# Altium PCB RevB.PcbDoc (part 2 of 2)
Units mm, origin at the board's own origin, x right, y up, seen from the top; angles counter-clockwise.
Board outline 132.46 x 77.34 mm, 2 copper layers (Top Layer, Bottom Layer); 132 components, 78 nets, 535 pads, 141 vias.
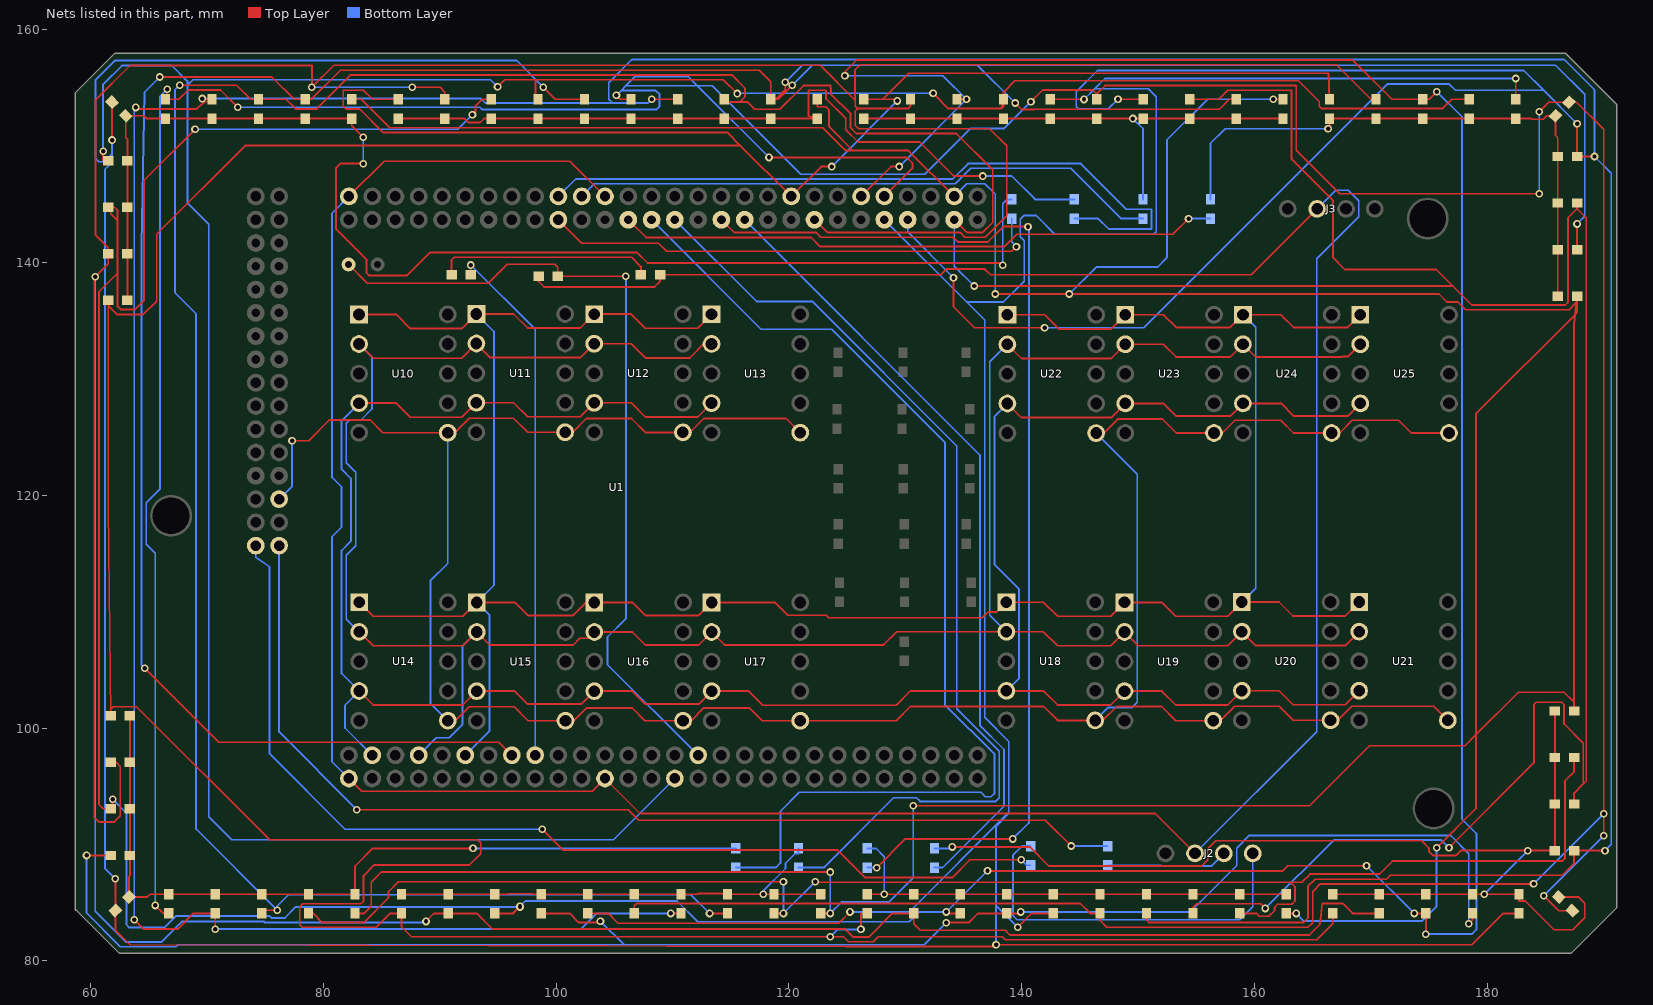
[diagram p2: the nets of this part, all layers, seen from the top]

## Via types
v1: diameter 0.66, hole 0.381, Top Layer to Bottom Layer, 141 vias

## Nets (pads, with @x,y where several pads share a name; then routed paths per layer and width w, separated by ;. In a path a pad name is that pad's centre, name@x,y a point inside that pad or via, vN(x,y) a via of type N, cw(c..) or ccw(c..) an arc to the next point about the centre after c; other vN are vias at no path point) (continued)
C_DP/IO_VB7N2_194: U1.194 U10.6 U11.6 U12.6 U13.6 U14.6 U15.6 U16.6 U17.6 U18.6 U19.6 U20.6 U21.6 U22.6 U23.6 U24.6 U25.6 | length 234
  Top Layer w0.152: v1(77.318,124.689) 78.74,124.689 80.518,126.467 84.023,126.467 85.117,125.373 U10.6@90.693,125.373 91.288,125.373 92.534,126.619 96.342,126.619 97.548,125.413 U11.6@100.773,125.413 101.422,125.413 102.603,126.594 106.477,126.594 107.672,125.398 U12.6@110.893,125.398 111.504,125.398 112.7,126.594 119.758,126.594 U13.6@120.973,125.378 ; U14.6@90.701,100.642 91.345,100.642 92.532,101.829 96.39,101.829 97.587,100.631 U15.6@100.805,100.631 101.52,100.631 102.616,101.727 106.524,101.727 107.62,100.631 U16.6@110.907,100.631 111.604,100.631 112.7,101.727 116.608,101.727 117.704,100.631 U17.6@120.978,100.631 129.21,100.631 130.432,101.854 141.884,101.854 143.084,100.655 U18.6@146.304,100.655 146.959,100.655 148.158,101.854 152.02,101.854 153.238,100.635 U19.6@156.452,100.635 157.049,100.635 158.293,101.879 162.109,101.879 163.322,100.666 U20.6@166.531,100.666 167.138,100.666 168.351,101.879 175.396,101.879 U21.6@176.609,100.666 ; U22.6@146.388,125.342 147.033,125.342 148.234,126.543 152.095,126.543 153.289,125.349 U23.6@156.519,125.349 157.226,125.349 158.318,126.441 162.255,126.441 163.347,125.349 U24.6@166.624,125.349 167.31,125.349 168.402,126.441 172.364,126.441 173.457,125.349 U25.6@176.708,125.349
  Bottom Layer w0.152: U1.194@76.201,119.669 77.318,120.786 v1(77.318,124.689) ; U10.6@90.693,125.373 90.693,114.133 89.203,112.642 89.203,102.14 U14.6@90.701,100.642 ; U18.6@146.304,100.655 147.422,101.772 149.487,101.772 149.924,102.21 149.924,121.806 U22.6@146.388,125.342
C_e/IO_VB7N0_183: U1.183 U10.4 U11.4 U12.4 U13.4 U14.4 U15.4 U16.4 U17.4 U18.4 U19.4 U20.4 U21.4 U22.4 U23.4 U24.4 U25.4 | length 219.3
  Top Layer w0.152: U10.4@83.073,127.913 86.26,127.913 87.478,126.695 91.896,126.695 U11.4@93.153,127.953 96.342,127.953 97.549,126.746 102.081,126.746 U12.4@103.273,127.938 106.451,127.938 107.669,126.721 112.156,126.721 U13.4@113.353,127.918 ; U14.4@83.081,103.182 84.282,101.981 91.995,101.981 U15.4@93.185,103.171 96.447,103.171 97.561,102.057 102.173,102.057 U16.4@103.287,103.171 106.528,103.171 107.642,102.057 112.244,102.057 U17.4@113.358,103.171 116.535,103.171 117.751,101.956 129.21,101.956 130.449,103.195 U18.4@138.684,103.195 141.864,103.195 143.078,101.981 147.637,101.981 U19.4@148.832,103.175 152.044,103.175 153.238,101.981 157.685,101.981 U20.4@158.911,103.206 162.103,103.206 163.303,102.006 167.79,102.006 U21.4@168.989,103.206 ; U22.4@138.768,127.882 139.98,126.67 147.68,126.67 U23.4@148.899,127.889 152.171,127.889 153.264,126.797 157.912,126.797 U24.4@159.004,127.889 162.281,127.889 163.373,126.797 167.996,126.797 U25.4@169.088,127.889
  Bottom Layer w0.152: U10.4@83.073,127.913 81.575,126.414 81.575,122.238 82.376,121.437 82.376,116.053 81.575,115.252 81.575,104.688 U14.4@83.081,103.182 81.864,101.965 81.864,100.006 U1.183@84.201,97.669 ; U18.4@138.684,103.195 139.777,104.287 139.777,111.912 137.668,114.021 137.668,126.782 U22.4@138.768,127.882
C_f/IO_VB7N0_176: U1.176 U10.2 U11.2 U12.2 U13.2 U14.2 U15.2 U16.2 U17.2 U18.2 U19.2 U20.2 U21.2 U22.2 U23.2 U24.2 U25.2 | length 226.1
  Top Layer w0.152: U10.2@83.073,132.993 84.291,131.775 91.896,131.775 U11.2@93.153,133.033 94.36,131.826 102.081,131.826 U12.2@103.273,133.018 106.453,133.018 107.671,131.801 111.502,131.801 112.7,132.998 U13.2@113.353,132.998 ; U14.2@83.081,108.262 84.282,107.061 91.995,107.061 U15.2@93.185,108.251 94.299,107.137 101.476,107.137 102.047,107.707 102.743,107.707 U16.2@103.287,108.251 106.556,108.251 107.671,107.137 112.244,107.137 U17.2@113.358,108.251 114.472,107.137 128.119,107.137 129.257,108.275 U18.2@138.684,108.275 141.864,108.275 143.078,107.061 147.637,107.061 U19.2@148.832,108.255 150.026,107.061 157.685,107.061 U20.2@158.911,108.286 160.111,107.086 167.79,107.086 U21.2@168.989,108.286 ; U22.2@138.768,132.962 139.98,131.75 147.68,131.75 U23.2@148.899,132.969 152.171,132.969 153.264,131.877 157.912,131.877 U24.2@159.004,132.969 160.096,131.877 167.538,131.877 167.589,131.928 168.046,131.928 U25.2@169.088,132.969
  Bottom Layer w0.152: U10.2@83.073,132.993 84.176,131.891 84.176,127.406 83.236,126.467 82.261,126.467 81.981,126.187 81.981,122.789 82.782,121.988 82.782,115.646 81.981,114.845 81.981,109.362 U14.2@83.081,108.262 ; U1.176@88.201,97.669 89.694,99.162 90.83,99.162 91.948,100.279 91.948,107.014 U15.2@93.185,108.251 ; U18.2@138.684,108.275 137.262,109.698 137.262,131.455 U22.2@138.768,132.962
C_g/IO_VB6N1_171: U1.171 U10.1 U11.1 U12.1 U13.1 U14.1 U15.1 U16.1 U17.1 U18.1 U19.1 U20.1 U21.1 U22.1 U23.1 U24.1 U25.1 | length 225.4
  Top Layer w0.152: U10.1@83.073,135.533 86.258,135.533 87.476,134.315 91.896,134.315 U11.1@93.153,135.573 96.342,135.573 97.549,134.366 102.081,134.366 U12.1@103.273,135.558 106.453,135.558 107.671,134.341 112.156,134.341 U13.1@113.353,135.538 ; U14.1@83.081,110.802 84.282,109.601 91.995,109.601 U15.1@93.185,110.791 96.447,110.791 97.561,109.677 101.476,109.677 102.591,110.791 U16.1@103.287,110.791 106.556,110.791 107.671,109.677 112.244,109.677 U17.1@113.358,110.791 118.796,110.791 119.888,109.699 123.203,109.699 123.43,109.472 136.624,109.472 137.123,109.971 137.84,109.971 U18.1@138.684,110.815 141.864,110.815 143.078,109.601 147.637,109.601 U19.1@148.832,110.795 152.044,110.795 153.238,109.601 157.685,109.601 U20.1@158.911,110.826 162.103,110.826 163.303,109.626 167.79,109.626 U21.1@168.989,110.826 ; U22.1@138.768,135.502 141.968,135.502 143.18,134.29 147.68,134.29 U23.1@148.899,135.509 152.171,135.509 153.264,134.417 157.912,134.417 U24.1@159.004,135.509 162.255,135.509 163.347,134.417 167.996,134.417 U25.1@169.088,135.509
  Bottom Layer w0.152: U1.171@92.201,97.669 94.285,99.753 94.285,109.692 U15.1@93.185,110.791 94.666,112.272 94.666,134.06 U11.1@93.153,135.573 ; U20.1@158.911,110.826 160.096,112.012 160.096,134.417 U24.1@159.004,135.509
D0: D10.1 D11.1 D12.1 D13.1 D14.1 D15.1 D16.1 D17.1 D18.1 D19.1 R30.2 | length 114.5
  Top Layer w0.152: D10.1@63.179,136.743 D11.1@63.179,140.743 D12.1@63.179,144.743 D13.1@63.179,148.743 63.179,150.571 63.022,150.728 D14.1@63.022,152.603 64.592,152.603 64.836,152.358 D15.1@66.439,152.358 D16.1@70.439,152.358 D17.1@74.439,152.358 D18.1@78.439,152.358 D19.1@82.439,152.358 82.439,151.749 v1(83.439,150.749) ; v1(83.439,148.488) 81.458,148.488 81.102,148.133 81.102,142.85 83.718,140.233 83.718,139.09 83.922,138.887 87.198,138.887 89.154,140.843 106.96,140.843 107.848,139.954 138.176,139.954 v1(138.379,139.751)
  Bottom Layer w0.152: v1(83.439,148.488) v1(83.439,150.749) ; v1(138.379,139.751) 138.379,145.034 138.76,145.415 R30.2@139.141,145.415
D0/IO_VB2N0_37: R30.1 U1.37 | length 43.2
  Top Layer w0.152: U1.37@100.201,143.669 102.214,141.656 108.799,141.656 109.503,140.951 139.141,140.951 v1(139.548,141.358)
  Bottom Layer w0.152: R30.1@139.141,143.764 139.141,141.764 v1(139.548,141.358)
D1: D20.1 D21.1 D22.1 D23.1 D24.1 D25.1 D26.1 D27.1 D28.1 D29.1 R31.2 | length 67
  Top Layer w0.152: D20.1@86.439,152.358 D21.1@90.439,152.358 92.142,152.358 92.488,152.013 93.462,152.013 93.808,152.358 D22.1@94.439,152.358 D23.1@98.439,152.358 D24.1@102.439,152.358 D25.1@106.439,152.358 D26.1@110.439,152.358 D27.1@114.439,152.358 D28.1@118.439,152.358 D29.1@122.439,152.358 121.691,152.587 121.691,154.79 123.19,154.79 123.19,154.076 124.892,152.375 124.892,151.384 125.933,150.343 131.242,150.343 134.163,147.422 v1(136.652,147.422)
  Bottom Layer w0.152: v1(136.652,147.422) 139.141,147.422 141.148,145.415 R31.2@144.526,145.415
D1/IO_VB2N0_38: R31.1 U1.38 | length 62.4
  Bottom Layer w0.152: U1.38@100.201,145.669 101.7,147.168 134.071,147.168 135.392,148.488 145.085,148.488 148.996,144.577 151.155,144.577 151.155,142.875 147.472,142.875 146.583,143.764 R31.1@144.526,143.764
D1_OUT: D1.2 R50.1 | length 18.6
  Top Layer w0.152: D1.2@91.02,138.949 91.02,140.208 91.249,140.436 106.489,140.436 107.283,139.643 R50.1@107.283,138.949
D2: D30.1 D31.1 D32.1 D33.1 D34.1 D35.1 D36.1 D37.1 D38.1 D39.1 R32.2 | length 43.3
  Top Layer w0.152: D30.1@126.439,152.358 D31.1@130.439,152.358 D32.1@134.439,152.358 D33.1@138.439,152.358 D34.1@142.439,152.358 D35.1@146.439,152.358 v1(149.555,152.358) D36.1@150.439,152.358 D37.1@154.439,152.358 D38.1@158.439,152.358 D39.1@162.439,152.358
  Bottom Layer w0.152: v1(149.555,152.358) 150.419,151.495 R32.2@150.419,145.415
D2/IO_VB2N0_41: R32.1 U1.41 | length 51
  Bottom Layer w0.152: U1.41@102.201,145.669 103.293,146.761 134.296,146.761 135.617,148.082 144.221,148.082 148.539,143.764 R32.1@150.419,143.764
D3: D40.1 D41.1 D42.1 D43.1 D44.1 D45.1 D46.1 D47.1 D48.1 D49.1 R33.2 | length 51.5
  Top Layer w0.152: v1(166.319,151.486) 166.439,151.606 D40.1@166.439,152.358 D41.1@170.439,152.358 D42.1@174.439,152.358 D43.1@178.439,152.358 D44.1@182.439,152.358 183.795,152.358 183.861,152.292 184.809,152.292 185.115,152.598 D45.1@185.855,152.598 185.855,150.924 186.055,150.724 D46.1@186.055,149.098 D47.1@186.055,145.098 D48.1@186.055,141.098 D49.1@186.055,137.098
  Bottom Layer w0.152: R33.2@156.21,145.415 156.21,150.216 157.48,151.486 v1(166.319,151.486)
D3/IO_VB2N0_43: R33.1 U1.43 | length 52
  Top Layer w0.152: U1.43@106.201,143.669 107.732,142.138 121.922,142.138 122.702,141.358 138.512,141.358 139.571,142.416 152.983,142.416 v1(154.33,143.764)
  Bottom Layer w0.152: v1(154.33,143.764) R33.1@156.21,143.764
D5: D60.1 D61.1 D62.1 D63.1 D64.1 D65.1 D66.1 D67.1 D68.1 D69.1 R40.2 | length 70.9
  Top Layer w0.152: D60.1@63.389,101.059 D61.1@63.389,97.059 D62.1@63.389,93.059 D63.1@63.389,89.059 63.389,87.306 63.307,87.224 D64.1@63.307,85.487 64.872,85.487 65.111,85.726 D65.1@66.722,85.726 D66.1@70.722,85.726 D67.1@74.722,85.726 D68.1@78.722,85.726 D69.1@82.722,85.726 82.722,88.138 84.246,89.662 v1(92.862,89.662)
  Bottom Layer w0.152: v1(92.862,89.662) R40.2@115.443,89.662
D5/IO_VB2N1_45: R40.1 U1.45 | length 92.8
  Bottom Layer w0.152: U1.45@108.201,143.669 117.606,134.264 123.672,134.264 133.401,124.536 133.401,102.014 137.668,97.747 137.668,94.412 137.363,94.107 136.881,94.107 136.5,94.488 120.904,94.488 119.274,92.858 119.274,88.413 118.872,88.011 R40.1@115.443,88.011
D6: D70.1 D71.1 D72.1 D73.1 D74.1 D75.1 D76.1 D77.1 D78.1 D79.1 R41.2 | length 41.4
  Top Layer w0.152: D70.1@86.722,85.726 D71.1@90.722,85.726 D72.1@94.722,85.726 95.84,85.726 95.876,85.762 97.973,85.762 98.009,85.726 D73.1@98.722,85.726 D74.1@102.722,85.726 D75.1@106.722,85.726 D76.1@110.722,85.726 112.127,85.726 112.186,85.786 114.26,85.786 114.32,85.726 D77.1@114.722,85.726 v1(117.805,85.726) D78.1@118.722,85.726 D79.1@122.722,85.726
  Bottom Layer w0.152: v1(117.805,85.726) 117.805,86.03 119.71,87.935 119.71,88.392 120.523,89.205 120.828,89.205 R41.2@120.828,89.662
D6/IO_VB2N2_49: R41.1 U1.49 | length 84
  Bottom Layer w0.152: U1.49@110.201,143.669 117.218,136.652 121.996,136.652 134.417,124.231 134.417,101.648 138.074,97.991 138.074,94.005 137.77,93.701 131.267,93.701 130.962,94.005 128.981,94.005 122.987,88.011 R41.1@120.828,88.011
D7: D80.1 D81.1 D82.1 D83.1 D84.1 D85.1 D86.1 D87.1 D88.1 D89.1 R42.2 | length 41
  Top Layer w0.152: D80.1@126.722,85.726 v1(128.194,85.726) D81.1@130.722,85.726 D82.1@134.722,85.726 D83.1@138.722,85.726 D84.1@142.722,85.726 D85.1@146.722,85.726 D86.1@150.722,85.726 D87.1@154.722,85.726 D88.1@158.722,85.726 D89.1@162.722,85.726
  Bottom Layer w0.152: R42.2@126.721,89.662 127.483,89.662 128.194,88.951 v1(128.194,85.726)
D7/IO_VB2N3_55: R42.1 U1.55 | length 94.4
  Top Layer w0.152: U1.55@114.201,143.669 115.3,142.57 122.341,142.57 122.741,142.17 134.112,142.17 134.518,141.764 137.105,141.764 138.419,143.078 v1(140.538,143.078) ; v1(127.533,88.011) 129.997,90.475 v1(139.243,90.475)
  Bottom Layer w0.152: R42.1@126.721,88.011 v1(127.533,88.011) ; v1(139.243,90.475) 140.614,91.846 140.614,143.002 v1(140.538,143.078)
D8: D90.1 D91.1 D92.1 D93.1 D94.1 D95.1 D96.1 D97.1 D98.1 D99.1 R43.2 | length 101.1
  Top Layer w0.152: v1(134.036,89.789) 140.691,89.789 142.342,88.138 155.448,88.138 155.981,88.671 155.981,89.637 156.667,90.322 174.351,90.322 174.978,89.695 174.978,89.408 175.343,89.043 177.293,89.043 177.722,89.472 v1(183.476,89.472) D96.1@185.801,89.472 D97.1@185.801,93.472 D98.1@185.801,97.472 D99.1@185.801,101.472 ; D90.1@166.722,85.726 D91.1@170.722,85.726 D92.1@174.722,85.726 D93.1@178.722,85.726 v1(179.73,85.726) D94.1@182.722,85.726 182.722,85.141 183.261,85.141 185.725,82.677 187.353,82.677 188.366,83.69 188.366,84.966 187.85,85.482 D95.1@186.139,85.482
  Bottom Layer w0.152: R43.2@132.512,89.662 133.909,89.662 v1(134.036,89.789) ; v1(179.73,85.726) v1(183.476,89.472)
D8/IO_VB2N3_57: R43.1 U1.57 | length 67.8
  Bottom Layer w0.152: U1.57@116.201,143.669 136.411,123.459 136.411,100.229 138.481,98.159 138.481,93.294 133.198,88.011 R43.1@132.512,88.011
G0/IO_VB3N2_69: D10.2 D20.2 D30.2 D40.2 D60.2 D70.2 D80.2 D90.2 U1.69 | length 360.8
  Top Layer w0.152: D10.2@61.528,136.743 61.528,136.262 ; D20.2@86.439,154.009 84.226,154.009 83.446,154.79 81.709,154.79 81.709,153.416 81.938,153.187 83.109,153.187 85.125,151.172 114.698,151.172 115.832,150.038 ; v1(123.673,148.234) 122.766,148.234 U1.69@120.201,145.669 115.832,150.038 ; v1(126.187,82.702) 126.187,84.075 D80.2@126.722,84.075 ; D30.2@126.439,154.009 128.05,154.009 ; v1(129.311,153.873) 129.175,154.009 128.05,154.009 ; D40.2@166.439,154.009 166.363,156.261 130.302,156.261 128.05,154.009 ; D90.2@166.722,84.075 166.722,83.181 165.354,81.814 138.583,81.814 138.329,82.067 127.687,82.067 127.256,81.636 125.121,81.636 124.689,82.067 v1(123.546,82.067) 87.579,82.067 86.722,82.925 D70.2@86.722,84.075 85.751,84.075 84.557,82.88 78.207,82.88 77.978,83.109 77.978,84.658 78.232,84.912 83.236,84.912 83.464,85.141 83.464,87.325 84.379,88.24 92.558,88.24 93.523,89.205 93.523,90.145 93.269,90.399 75.387,90.399 63.957,101.829 61.967,101.829 61.738,101.6 D60.2@61.738,101.059 61.528,118.98 61.528,136.262 ; 61.528,136.262 62.255,135.534 64.541,135.534 65.684,136.677 65.684,142.443 73.279,150.038 115.832,150.038
  Bottom Layer w0.152: v1(123.546,82.067) 124.181,82.702 v1(126.187,82.702) ; v1(123.673,148.234) v1(129.311,153.873)
G1/IO_VB3N2_70: D11.2 D21.2 D31.2 D41.2 D61.2 D71.2 D81.2 D91.2 U1.70 | length 419.3
  Top Layer w0.152: D61.2@61.738,97.059 62.199,97.059 62.56,96.698 62.56,92.481 62.001,91.923 60.757,91.923 60.325,92.354 60.325,138.684 v1(60.401,138.76) 61.528,139.887 D11.2@61.528,140.743 61.528,141.275 60.427,142.376 60.427,153.949 63.398,156.921 79.019,156.921 v1(79.019,155.042) 80.924,156.947 122.682,156.947 125.679,153.95 ; v1(87.655,155.042) 90.033,155.042 90.439,154.635 D21.2@90.439,154.009 ; v1(88.824,83.388) 89.511,84.075 D71.2@90.722,84.075 93.192,84.075 94.534,82.733 124.837,82.733 125.527,82.042 126.849,82.042 128.882,84.075 D81.2@130.722,84.075 130.722,83.185 131.281,82.626 138.583,82.626 138.989,82.22 164.711,82.22 165.627,83.136 165.811,84.938 167.565,84.938 168.427,84.075 D91.2@170.722,84.075 ; U1.70@122.201,143.669 123.293,142.577 134.702,142.577 135.109,142.17 136.881,142.17 138.709,143.999 138.709,150.012 137.236,151.486 125.984,151.486 125.705,151.765 125.705,153.01 125.908,153.213 ; D31.2@130.439,154.009 130.439,153.416 130.236,153.213 125.908,153.213 ; D41.2@170.439,154.009 170.002,154.009 167.038,156.974 126.113,156.974 125.679,156.54 125.679,153.95 ; 125.679,153.95 125.705,153.924 125.705,153.416 125.908,153.213
  Bottom Layer w0.152: v1(60.401,138.76) 60.401,84.277 63.068,81.61 66.091,81.61 67.869,83.388 74.88,83.388 74.981,83.287 88.722,83.287 v1(88.824,83.388) ; v1(79.019,155.042) v1(87.655,155.042)
G2/IO_VB3N1_78: D12.2 D22.2 D32.2 D42.2 D62.2 D72.2 D82.2 D92.2 U1.78 | length 395.6
  Top Layer w0.152: D12.2@61.528,144.743 D12.2@61.747,144.743 ; v1(61.9,93.878) 61.9,93.059 D62.2@61.738,93.059 61.094,93.059 60.731,93.421 60.731,137.49 62.332,139.09 ; v1(68.986,151.435) 64.592,147.041 64.592,136.703 63.856,135.966 62.586,135.966 62.332,136.22 62.332,139.09 ; v1(92.812,152.679) 93.066,152.933 93.066,153.416 93.659,154.009 D22.2@94.439,154.009 ; D72.2@94.722,84.075 96.292,84.075 ; v1(96.901,84.633) 96.343,84.075 96.292,84.075 ; v1(96.901,84.684) 96.292,84.075 ; v1(124.816,156.032) 124.816,156.388 125.808,157.38 168.435,157.38 171.806,154.009 D42.2@174.439,154.009 175.015,154.009 v1(175.666,154.661) ; U1.78@126.201,145.669 128.766,148.234 v1(129.48,148.234) ; v1(133.528,84.201) 133.654,84.075 D82.2@134.722,84.075 ; D32.2@134.439,154.009 v1(135.255,154.009) ; v1(137.058,87.732) 162.428,87.732 162.86,88.163 v1(169.621,88.163) ; v1(173.71,84.075) D92.2@174.722,84.075 v1(174.722,82.296) ; D12.2@61.747,144.743 61.747,144.17 62.332,143.586 ; D12.2@61.747,144.743 62.064,144.743 62.332,144.475 62.332,143.586 ; 62.332,139.09 62.332,143.586
  Bottom Layer w0.152: v1(61.9,93.878) 63.094,92.685 63.094,83.109 63.343,82.859 66.349,82.859 67.335,83.845 75.387,83.845 75.539,83.693 76.708,83.693 77.648,84.633 v1(96.901,84.633) ; v1(68.986,151.435) 91.567,151.435 v1(92.812,152.679) ; v1(96.901,84.684) 97.358,85.141 110.388,85.141 112.165,83.364 130.329,83.364 131.166,84.201 v1(133.528,84.201) v1(137.058,87.732) ; v1(124.816,156.032) 133.232,156.032 v1(135.255,154.009) v1(129.48,148.234) ; v1(169.621,88.163) v1(173.71,84.075) ; v1(174.722,82.296) 178.664,82.296 179.07,82.702 179.07,90.932 177.825,92.177 177.825,152.502 v1(175.666,154.661)
G3/IO_VB3N1_80: D63.2 D73.2 D83.2 D93.2 | length 173.6
  Top Layer w0.152: v1(59.665,89.059) D63.2@61.738,89.059 ; D73.2@98.722,84.075 101.168,84.075 101.957,83.287 103.683,83.287 v1(103.81,83.414) ; v1(133.528,83.287) 135.458,83.287 136.247,84.075 D83.2@138.722,84.075 139.777,84.075 v1(139.903,84.201) ; v1(178.41,83.182) 178.722,83.495 D93.2@178.722,84.075
  Bottom Layer w0.152: v1(59.665,89.059) 59.665,84.111 62.572,81.204 67.31,81.204 67.488,81.382 105.842,81.382 ; v1(103.81,83.414) 105.842,81.382 ; v1(133.528,83.287) 131.623,81.382 ; v1(139.903,84.201) 154.483,84.201 158.471,88.189 158.471,89.687 159.563,90.779 176.835,90.779 178.41,89.205 v1(178.41,83.182) ; 105.842,81.382 131.623,81.382 ; 105.842,81.382 131.623,81.382
G3/IO_VB5N0_143: D13.2 D23.2 D33.2 D43.2 U1.143 | length 258.1
  Top Layer w0.152: v1(61.087,149.555) 61.087,148.743 D13.2@61.528,148.743 ; v1(94.971,155.092) 95.58,155.702 98.238,155.702 ; D23.2@98.439,154.009 98.238,154.009 98.238,155.702 ; v1(132.385,154.533) 133.706,153.213 138.236,153.213 ; D43.2@178.439,154.009 176.936,154.009 176.14,153.213 165.762,153.213 165.559,153.416 165.559,153.822 163.779,155.602 139.406,155.602 138.439,154.635 D33.2@138.439,154.009 ; 98.238,155.702 114.377,155.702 ; 98.238,155.702 98.491,155.702 114.376,155.702 ; 114.377,155.702 v1(115.57,154.508) 114.376,155.702 ; 138.236,153.213 D33.2@138.439,154.009 ; 138.236,153.213 138.439,153.416 D33.2@138.439,154.009
  Bottom Layer w0.152: v1(61.087,149.555) 61.087,155.296 62.713,156.921 66.98,156.921 68.326,155.575 68.326,155.219 ; v1(94.971,155.092) 94.361,155.702 68.809,155.702 68.326,155.219 ; U1.143@110.201,95.669 104.931,90.399 72.136,90.399 70.155,92.38 70.155,143.281 68.326,145.11 68.326,155.219 ; v1(115.57,154.508) 115.595,154.533 v1(132.385,154.533)
G4/IO_VB3N1_81: D14.2 D24.2 D34.2 D44.2 D64.2 D74.2 D84.2 D94.2 U1.81 | length 444
  Top Layer w0.152: v1(61.855,150.515) D14.2@61.855,153.77 ; v1(62.139,87.046) D64.2@62.139,84.319 62.139,82.641 63.398,81.382 124.868,81.229 137.643,81.229 v1(137.795,81.382) 178.673,81.382 181.367,84.075 D94.2@182.722,84.075 ; v1(98.908,155.042) 99.94,154.009 D24.2@102.439,154.009 ; D74.2@102.722,84.075 104.479,84.075 105.314,83.24 124.285,83.24 v1(125.246,84.201) ; v1(139.649,82.88) 140.844,84.075 D84.2@142.722,84.075 ; D34.2@142.439,154.009 145.339,154.009 v1(145.348,154) ; D44.2@182.439,154.009 v1(182.439,155.804)
  Bottom Layer w0.152: v1(61.855,150.515) 61.855,149.338 ; v1(62.139,87.046) 61.239,87.946 61.239,147.981 61.855,148.596 61.855,149.338 ; v1(98.908,155.042) 96.596,157.353 62.115,157.353 60.427,155.665 60.427,148.946 60.726,148.646 61.163,148.646 61.855,149.338 ; v1(125.246,84.201) 130.327,84.201 138.887,92.761 ; U1.81@128.201,143.669 135.269,136.601 ; v1(137.795,81.382) 137.795,84.734 ; v1(139.649,82.88) 137.795,84.734 ; v1(145.348,154) 146.262,154.915 ; v1(182.439,155.804) 147.151,155.804 146.262,154.915 ; 135.269,136.601 136.817,135.053 136.817,100.912 138.887,98.842 138.887,92.761 ; 135.269,136.601 138.43,136.601 140.208,138.379 140.208,141.853 139.871,142.189 139.871,143.707 140.208,144.043 141.224,144.043 142.85,142.418 151.333,142.418 151.562,142.646 151.562,154.229 150.876,154.915 146.262,154.915 ; 137.795,84.734 137.795,91.566 138.887,92.658 138.887,92.761
G5/IO_VB3N1_82: D15.2 D25.2 D35.2 D45.2 D65.2 D75.2 D85.2 D95.2 U1.82 | length 424.3
  Top Layer w0.152: v1(65.557,84.76) 66.242,84.075 D65.2@66.722,84.075 ; D15.2@66.439,154.009 D15.2@66.599,154.009 ; v1(66.599,154.889) D15.2@66.599,154.009 ; v1(72.644,153.34) 71.171,154.813 68.402,154.813 67.598,154.009 D15.2@66.599,154.009 ; v1(105.181,154.356) 105.528,154.009 D25.2@106.439,154.009 ; D75.2@106.722,84.075 106.722,84.734 106.925,84.938 145.009,84.938 145.871,84.075 D85.2@146.722,84.075 146.722,83.478 147.32,82.88 164.595,82.88 164.994,83.28 164.994,85.949 165.659,86.614 v1(183.972,86.614) ; v1(118.288,149.022) 130.124,149.022 130.607,148.539 130.607,148.075 U1.82@128.201,145.669 ; v1(140.792,153.797) 141.808,154.813 146.101,154.813 146.439,154.475 ; D35.2@146.439,154.009 146.439,154.475 ; v1(184.455,145.898) 167.31,145.898 163.576,149.631 163.576,155.196 147.161,155.196 146.439,154.475 ; v1(184.455,152.952) 185.268,153.765 D45.2@187.022,153.765 187.662,153.765 189.992,151.435 v1(189.992,92.634) v1(189.992,90.754) ; v1(184.836,85.598) 186.119,84.314 D95.2@187.307,84.314
  Bottom Layer w0.152: v1(65.557,84.76) 65.557,115.011 64.795,115.773 64.795,119.355 65.964,120.523 65.964,154.254 v1(66.599,154.889) ; v1(72.644,153.34) 93.462,153.34 93.671,153.132 108.605,153.132 108.89,153.416 108.89,154.432 108.56,154.762 105.588,154.762 ; v1(105.181,154.356) 105.588,154.762 ; v1(118.288,149.022) 112.141,155.169 ; v1(140.792,153.797) 138.506,151.511 135.61,151.511 131.674,147.574 121.005,147.574 113.411,155.169 112.141,155.169 ; v1(183.972,86.614) v1(189.992,92.634) ; v1(184.455,145.898) v1(184.455,152.952) ; v1(184.836,85.598) v1(189.992,90.754) ; 105.588,154.762 105.994,155.169 ; 105.994,155.169 112.141,155.169 ; 105.994,155.169 106.807,155.981 111.328,155.981 112.141,155.169
G6/IO_VB3N1_83: D16.2 D26.2 D36.2 D46.2 D66.2 D76.2 D86.2 D96.2 U1.83 | length 494.8
  Top Layer w0.152: v1(63.754,83.541) 64.567,82.728 67.487,82.728 68.834,84.075 D66.2@70.722,84.075 v1(70.722,82.728) ; v1(63.881,153.314) 64.008,153.187 69.139,153.187 69.595,153.643 69.753,153.712 D16.2@70.439,154.009 69.664,154.009 v1(69.595,154.078) ; v1(108.229,154.009) D26.2@110.439,154.009 ; v1(109.855,84.075) D76.2@110.722,84.075 ; v1(134.137,138.684) 134.137,136.195 135.941,134.391 v1(141.961,134.391) ; v1(148.269,154.009) D36.2@150.439,154.009 ; D86.2@150.722,84.075 150.722,83.515 150.951,83.287 164.188,83.287 164.588,83.686 164.588,86.407 165.202,87.021 171.336,87.021 171.666,87.351 186.411,87.351 187.452,88.392 D96.2@187.452,89.472 v1(190.107,89.472) ; v1(187.706,151.917) D46.2@187.706,149.098 v1(189.205,149.098)
  Bottom Layer w0.152: v1(63.754,83.541) 63.754,153.187 v1(63.881,153.314) ; v1(69.595,154.078) 93.537,154.078 93.92,153.695 104.852,153.695 ; v1(70.722,82.728) 102.133,82.728 103.481,84.075 v1(109.855,84.075) ; v1(108.229,154.009) 107.915,153.695 104.852,153.695 ; U1.83@130.201,143.669 130.201,142.62 v1(134.137,138.684) ; v1(141.961,134.391) 150.47,134.391 171.399,155.321 176.733,155.321 177.267,154.788 184.836,154.788 ; v1(148.269,154.009) 147.447,153.187 144.882,153.187 144.678,153.391 144.678,154.661 146.507,156.489 183.134,156.489 184.836,154.788 ; v1(187.706,151.917) 184.836,154.788 ; v1(190.107,89.472) 190.652,90.018 190.652,147.65 v1(189.205,149.098) 189.205,154.827 186.602,157.429 106.502,157.429 104.521,155.448 104.521,154.026 104.852,153.695
G7/IO_VB3N0_87: D17.2 D27.2 D37.2 D47.2 D67.2 D77.2 D87.2 D97.2 U1.87 | length 412.2
  Top Layer w0.152: v1(67.666,155.219) 72.542,155.219 73.753,154.009 D17.2@74.439,154.009 76.799,154.009 77.621,153.187 79.451,153.187 82.374,156.11 115.086,156.11 116.23,154.965 116.23,154.229 115.773,153.772 ; D67.2@74.722,84.075 74.722,84.353 v1(76.048,84.353) ; v1(113.182,84.075) D77.2@114.722,84.075 ; D27.2@114.439,154.009 114.439,153.772 115.773,153.772 ; U1.87@134.201,143.669 135.293,142.577 136.659,142.577 137.508,143.426 137.508,147.962 134.391,151.079 125.781,151.079 125.298,151.562 125.298,152.756 123.61,154.444 123.61,154.929 123.576,154.963 123.576,155.196 121.262,155.196 119.228,153.162 117.069,153.162 116.459,153.772 115.773,153.772 ; v1(135.915,137.973) 177.033,137.973 ; D37.2@154.439,154.009 156.928,154.009 157.709,154.79 163.17,154.79 163.17,148.895 166.751,145.313 166.751,140.411 167.767,139.395 175.611,139.395 177.033,137.973 ; D87.2@154.722,84.075 154.722,84.593 155.042,84.912 160.528,84.912 v1(160.934,84.506) ; v1(176.708,89.713) 183.998,97.003 183.998,102.006 184.201,102.21 186.385,102.21 186.588,102.006 186.588,100.355 188.239,98.704 188.239,95.199 ; D97.2@187.452,93.472 187.452,94.412 188.239,95.199 ; D47.2@187.706,145.098 187.706,144.602 ; 177.033,137.973 178.659,136.347 186.715,136.347 186.919,136.55 186.919,143.815 187.706,144.602 ; 187.706,144.602 188.493,143.815 188.493,95.453 188.239,95.199
  Bottom Layer w0.152: v1(67.666,155.219) 67.653,155.219 67.259,154.826 67.259,137.389 69.063,135.585 69.063,91.338 v1(76.048,84.353) 76.048,84.709 77.013,85.674 111.583,85.674 v1(113.182,84.075) ; U1.87@134.201,143.669 134.201,139.687 v1(135.915,137.973) ; v1(160.934,84.506) 166.802,90.373 176.048,90.373 v1(176.708,89.713)
G8/IO_VB3N0_88: D68.2 D78.2 D88.2 D98.2 | length 131.9
  Top Layer w0.152: D68.2@78.722,84.075 79.128,84.075 79.917,83.287 83.464,83.287 85.598,85.42 85.598,85.954 86.436,86.792 v1(119.532,86.792) ; D78.2@118.722,84.075 v1(119.532,84.074) ; v1(119.532,84.074) v1(119.532,84.074) ; v1(119.532,84.074) v1(119.532,84.074) ; v1(122.25,86.792) 122.292,86.75 163.084,86.75 ; D88.2@158.722,84.075 160.17,84.075 160.405,83.84 161.237,83.84 161.725,84.328 161.725,84.611 161.976,84.861 163.195,84.861 163.474,85.141 163.474,86.36 163.084,86.75 ; D98.2@187.452,97.472 187.452,96.241 186.665,95.453 186.665,88.798 186.436,88.57 171.856,88.57 170.739,87.452 164.77,87.452 164.068,86.75 163.084,86.75
  Bottom Layer w0.152: v1(119.532,84.074) v1(119.532,86.792) ; v1(119.532,84.074) v1(122.25,86.792)
  other v1: 119.533,84.075
G8/IO_VB6N3_166: D18.2 D28.2 D38.2 D48.2 U1.166 | length 257
  Top Layer w0.152: v1(64.668,105.131) 71.018,98.781 95.089,98.781 U1.166@96.201,97.669 ; v1(65.964,155.931) 75.574,155.931 77.495,154.009 D18.2@78.439,154.009 78.969,154.009 81.476,156.516 117.447,156.516 118.439,155.524 D28.2@118.439,154.009 118.872,154.009 ; v1(119.685,155.473) 119.685,154.822 118.872,154.009 ; v1(120.285,155.219) 119.075,154.009 118.872,154.009 ; v1(139.446,153.695) 140.005,153.137 141.072,153.137 141.097,153.162 156.994,153.162 157.841,154.009 D38.2@158.439,154.009 ; D48.2@187.706,141.098 v1(187.706,143.307)
  Bottom Layer w0.152: v1(64.668,105.131) 64.389,105.41 64.389,141.453 64.643,154.61 v1(65.964,155.931) ; v1(119.685,155.473) 121.158,156.947 122.013,156.947 ; v1(120.285,155.219) 122.013,156.947 ; v1(139.446,153.695) 136.195,156.947 ; v1(187.706,143.307) 188.366,143.967 188.366,154.432 185.852,156.947 136.195,156.947 ; 122.013,156.947 136.195,156.947
G9/IO_VB4N3_93: D19.2 D29.2 D39.2 D49.2 D69.2 D79.2 D89.2 D99.2 U1.93 | length 386.7
  Top Layer w0.152: D19.2@82.439,154.009 83.268,154.009 85.7,151.578 122.92,151.578 124.892,149.606 125.504,149.606 ; D69.2@82.722,84.075 83.515,84.075 84.125,84.685 84.125,86.766 84.988,87.63 v1(123.546,87.63) ; D29.2@122.439,154.009 122.439,153.378 123.168,153.378 123.45,153.096 123.45,151.66 125.504,149.606 ; D79.2@122.722,84.075 v1(123.546,84.075) ; v1(130.683,93.32) 164.719,93.32 169.875,98.476 178.079,98.476 179.019,99.416 ; U1.93@134.201,145.669 130.264,149.606 125.504,149.606 ; v1(137.719,137.287) v1(144.094,137.287) 175.844,137.287 176.53,136.601 177.47,136.601 178.13,135.941 187.02,135.941 187.651,136.572 ; v1(161.62,154.009) D39.2@162.439,154.009 ; D89.2@162.722,84.075 v1(163.575,84.075) ; v1(175.641,89.713) 179.019,93.091 179.019,99.416 ; D99.2@187.452,101.472 187.452,102.21 ; 179.019,99.416 182.677,103.073 186.588,103.073 187.452,102.21 ; 179.019,99.416 179.019,127 187.541,135.522 ; 187.452,102.21 187.452,134.667 187.541,135.522 ; 187.541,135.522 187.651,136.572 ; 187.541,135.522 187.706,135.687 187.706,136.627 ; 187.651,136.572 187.706,136.627 ; 187.651,136.572 D49.2@187.706,137.098 187.706,136.627
  Bottom Layer w0.152: v1(123.546,87.63) v1(123.546,84.075) 124.517,85.046 128.59,85.046 130.683,87.139 v1(130.683,93.32) ; U1.93@134.201,145.669 135.293,146.761 136.836,146.761 137.719,145.878 v1(137.719,137.287) ; v1(144.094,137.287) 146.406,139.598 151.663,139.598 152.476,140.411 152.476,150.52 155.965,154.009 v1(161.62,154.009) ; v1(163.575,84.075) 164.236,83.414 174.371,83.414 175.641,84.684 v1(175.641,89.713)
GND: J2.2 J3.2 R4.1 R50.2 U1.GND1 U1.GND2 U1.GND3 U1.GND4 | length 290.2
  Top Layer w0.152: U1.GND4@82.201,95.669 83.306,94.564 103.096,94.564 U1.GND3@104.201,95.669 107.211,92.659 151.46,92.659 J2.2@154.889,89.23 ; U1.GND1@82.201,145.669 85.224,148.692 101.178,148.692 U1.GND2@104.201,145.669 ; R4.1@98.495,138.815 98.495,138.36 98.958,137.897 108.451,137.897 108.934,138.379 R50.2@108.934,138.949 133.043,138.949 133.524,139.429 136.834,139.429 137.314,138.949 159.726,138.949 J3.2@165.379,144.602
  Bottom Layer w0.152: U1.GND4@82.201,95.669 80.75,97.12 80.75,116.434 81.563,117.246 81.563,120.722 80.75,121.535 80.75,144.218 U1.GND1@82.201,145.669 ; J2.2@154.889,89.23 165.354,99.695 165.354,140.31 168.961,143.916 168.961,145.288 168.046,146.202 166.98,146.202 J3.2@165.379,144.602
IO_VB5N2_137/DAYLIGHT: R3.2 R4.2 U1.137 | length 71.1
  Top Layer w0.152: R3.2@82.169,139.827 83.784,138.212 94.168,138.212 95.809,139.852 99.892,139.852 100.146,139.598 R4.2@100.146,138.815 v1(105.994,138.815)
  Bottom Layer w0.152: v1(105.994,138.815) 105.994,109.398 104.419,107.823 104.419,105.451 U1.137@112.201,97.669
IO_VB7N0_185/UART_TX: R101.1 U1.185 | length 89.1
  Top Layer w0.152: v1(98.806,91.313) 100.584,89.535 124.164,89.535 126.543,87.156 134.026,87.156 135.56,88.691 v1(139.954,88.691)
  Bottom Layer w0.152: U1.185@74.201,115.669 74.201,114.656 75.387,113.843 75.387,97.79 81.864,91.313 v1(98.806,91.313) ; v1(139.954,88.691) 140.437,88.208 R101.1@140.77,88.208
IO_VB7N1_186/UART_RX: R100.2 U1.186 | length 91.3
  Top Layer w0.152: v1(82.88,92.989) 106.197,92.989 107.112,92.075 142.037,92.075 v1(144.247,89.865)
  Bottom Layer w0.152: U1.186@76.201,115.669 76.201,99.669 v1(82.88,92.989) ; v1(144.247,89.865) R100.2@147.396,89.865
UART_RX: J2.3 R100.1 | length 10.5
  Bottom Layer w0.152: R100.1@147.396,88.214 151.943,88.214 152.019,88.138 156.273,88.138 J2.3@157.366,89.23
UART_TX: J2.4 R101.2 | length 32.8
  Bottom Layer w0.152: R101.2@140.77,89.859 140.024,89.859 139.243,89.078 139.243,83.896 139.598,83.541 158.725,83.541 159.842,84.658 J2.4@159.842,89.23
WARN/IO_VB6N3_162: D1.1 U1.162 | length 45.2
  Top Layer w0.152: D1.1@92.671,138.949 v1(92.671,139.776)
  Bottom Layer w0.152: v1(92.671,139.776) 98.201,134.246 U1.162@98.201,97.669
pads on no net: H0.0 H2.0 H3.0 J3.4 U1.4 U1.5 U1.6 U1.9 U1.13 U1.18 U1.19 U1.20 U1.21 U1.22 U1.39 U1.44 U1.46 U1.50 U1.51 U1.52 U1.56 U1.63 U1.64 U1.65 U1.68 U1.71 U1.72 U1.73 U1.76 U1.84 U1.85 U1.86 U1.94 U1.95 U1.100 U1.101 U1.102 U1.103 U1.107 U1.108 U1.110 U1.111 U1.112 U1.114 U1.119 U1.120 U1.126 U1.127 U1.128 U1.131 U1.132 U1.133 U1.134 U1.135 U1.139 U1.142 U1.144 U1.145 U1.146 U1.147 U1.148 U1.159 U1.160 U1.161 U1.164 U1.167 U1.168 U1.169 U1.173 U1.174 U1.175 U1.177 U1.181 U1.182 U1.184 U1.187 U1.188 U1.189 U1.195 U1.198 U1.199 U1.203 U1.216 U1.220 U1.222 U1.223 U1.224 U1.230 U1.233 U1.234 U1.235 U1.236 U1.237 U1.238

## Polygon pours and split planes (outlines as drawn)
no net on Top Layer "NONET_L01_P000" (solid, pour order 0): 58.928,157.861 59.182,158.115 190.881,158.115 190.881,80.772 58.674,80.772
no net on Bottom Layer "NONET_L02_P002" (solid, pour order 2): 58.674,157.988 191.008,157.988 191.008,80.772 58.801,80.772

## Silkscreen, mask and mechanical layers (free items; w line width, h text height)
Mechanical 1:
  lines w0.254: 58.547,84.455 58.547,154.559 62.103,158.115 186.69,158.115 191.262,153.543 191.262,84.582 187.198,80.518 62.484,80.518 58.547,84.455
Mechanical 16:
  drawing of 1874 lines, arcs and shapes, not listed
  text "1" at 29.777,187.071 h1.78
  text "2" at 89.671,187.071 h1.78
  text "3" at 150.038,187.071 h1.78
  text "4" at 210.372,187.071 h1.78
  text "A" at 1.905,164.465 h1.78
  text "78" at 194.564,120.269 h1.52
  text "B" at 1.905,116.815 h1.78
  text "B" at 110.413,104.818 h1.78 r90
  text "A" at 67.843,104.056 h1.78 r90
  text "132" at 124.333,76.962 h1.52
  text "C" at 1.905,69.164 h1.78
  text "ENGINEER:" at 123.19,33.02 h1.14
  text "TITLE:" at 161.29,33.02 h1.14
  text "BLASTIT DAUGHTER BOARD" at 191.719,27.737 h1.52
  text "PCB DESIGNER:" at 123.19,25.527 h1.14
  text "D" at 1.905,21.615 h1.78
  text "D" at 237.998,21.615 h1.78
  text "DATE:" at 123.19,17.78 h1.14
  text "PART NO.:" at 161.29,17.78 h1.14
  text "REV:" at 214.63,17.78 h1.14
  text "Altium Limited" at 90.17,15.24 h1.78
  text "B" at 222.606,15.037 h1.52
  text ".PRINT_DATE" at 124.46,14.732 h1.78
  text "12a Rodborough Rd" at 90.17,12.7 h1.78
  text "Frenchs Forest" at 90.17,10.16 h1.78
  text "FILE NAME:" at 123.19,10.16 h1.14
  text "DWG NO:" at 161.29,10.16 h1.14
  text "SCALE:" at 214.63,10.16 h1.14
  text "NSW 2086" at 90.17,7.62 h1.78
  text ".PCB_FILE_NAME_NO_PATH" at 124.46,7.112 h1.78
  text "1" at 29.777,1.651 h1.78
  text "2" at 89.671,1.651 h1.78
  text "3" at 150.038,1.651 h1.78
  text "4" at 210.372,1.651 h1.78

## Text inside footprints (layer, text, board x,y; h text height)
J2: Bottom Overlay "VCC" at 153.303,95.767 h1.52 r90; Bottom Overlay "RX" at 160.553,93.917 h1.52 r90; Bottom Overlay "GND" at 155.553,95.417 h1.52 r90; Bottom Overlay "TX" at 158.053,94.017 h1.52 r90
J3: Top Overlay "5V0" at 168.843,138.115 h1.52 r90; Top Overlay "GND" at 166.043,138.415 h1.52 r90; Top Overlay "3V3" at 163.793,138.065 h1.52 r90
U1: Bottom Overlay "SilverLining SW" at 109.918,129.735 h1.52 r90; Bottom Overlay "Intel FPGA" at 106.846,127.111 h1.52 r90; Bottom Overlay "3V3" at 82.654,142.023 h0.75 r90; Bottom Overlay "3V3" at 82.526,101.319 h0.75 r90; Bottom Overlay "GND" at 82.654,149.447 h0.75 r90; Bottom Overlay "GND" at 82.526,94.023 h0.75 r90; Bottom Overlay "BLAST IT" at 75.358,107.207 h0.75 r90; Bottom Overlay "GND" at 104.542,149.319 h0.75 r90; Bottom Overlay "5V0" at 104.542,141.895 h0.75 r90; Bottom Overlay "5V0" at 104.628,101.235 h0.75 r90; Bottom Overlay "GND" at 104.628,94.035 h0.75 r90